# Altium PCB Nebulizer_medical.PcbDoc
Units mil, origin at the board's own origin, x right, y up, seen from the top; angles counter-clockwise.
Board outline 984.71 x 2243.02 mil, 4 copper layers (Top, Power, GND, Bottom), stack 35.4 mil thick; 125 components, 61 nets, 287 pads, 173 vias.
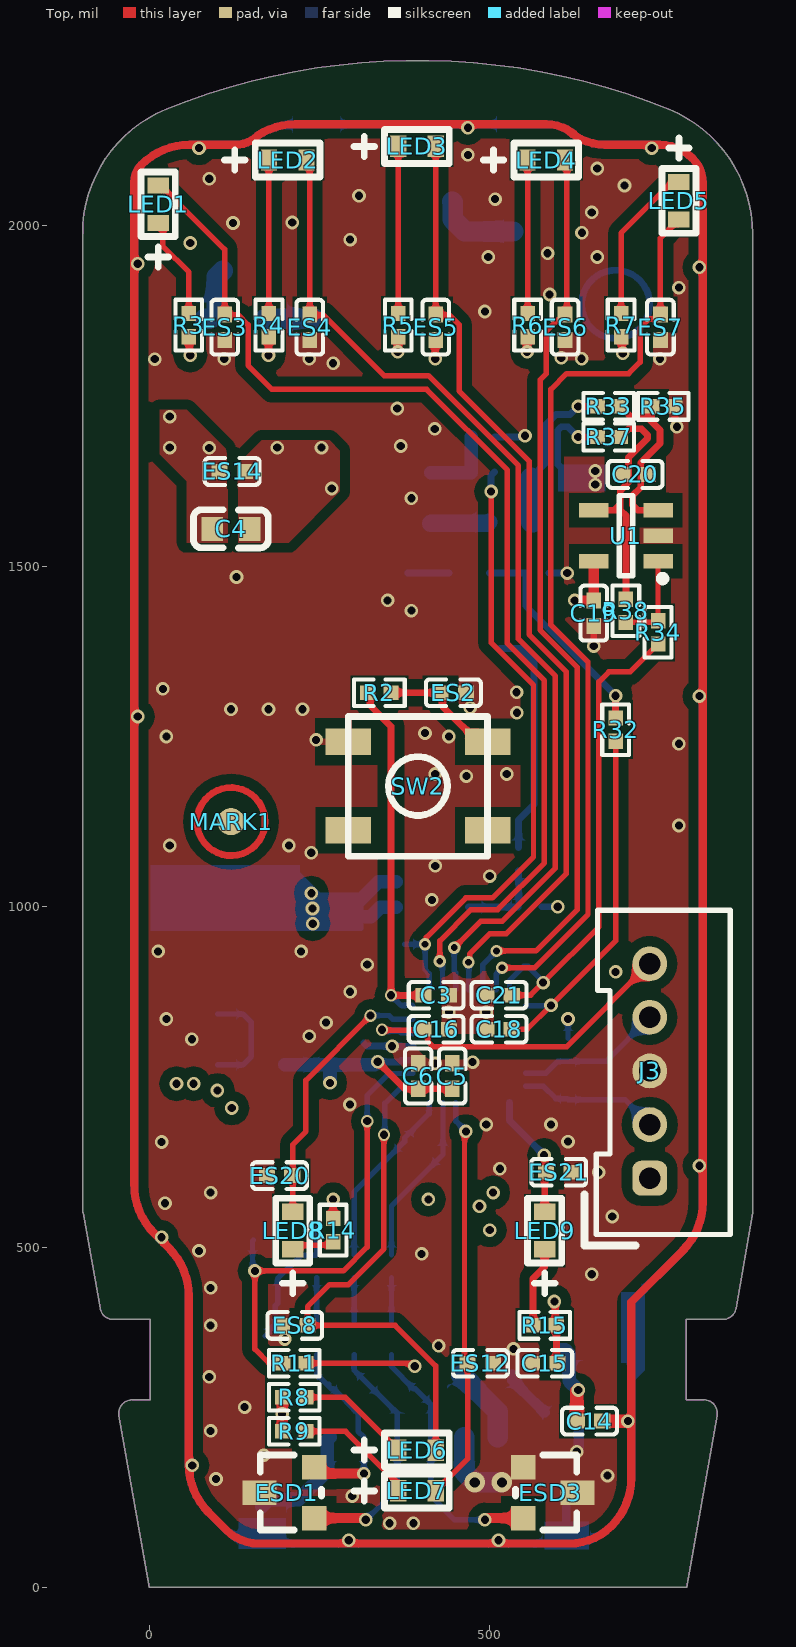
[diagram p0: Top view]
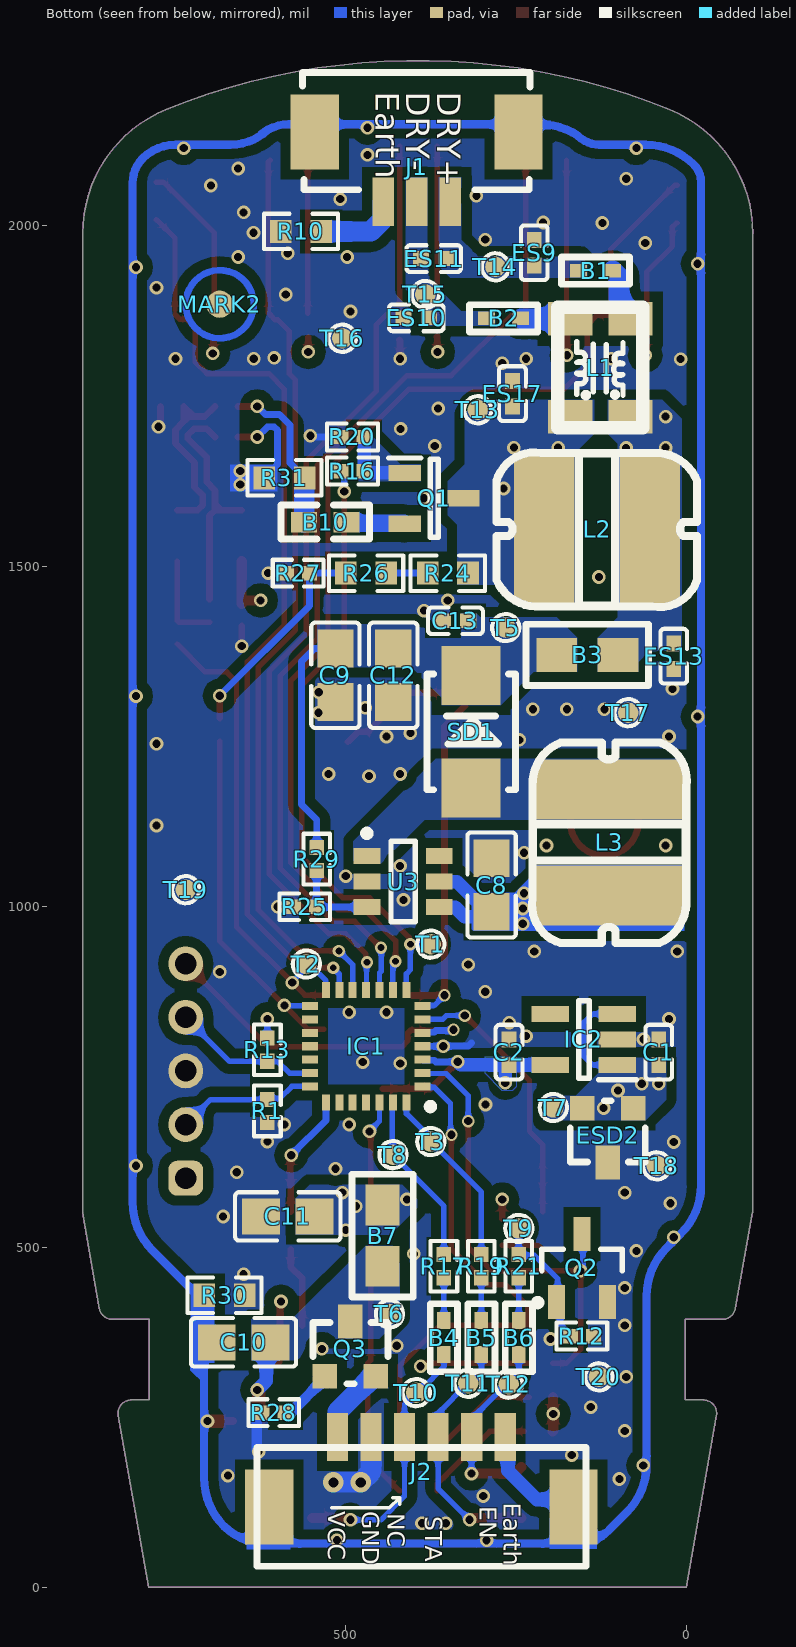
[diagram p1: Bottom view, seen from below]
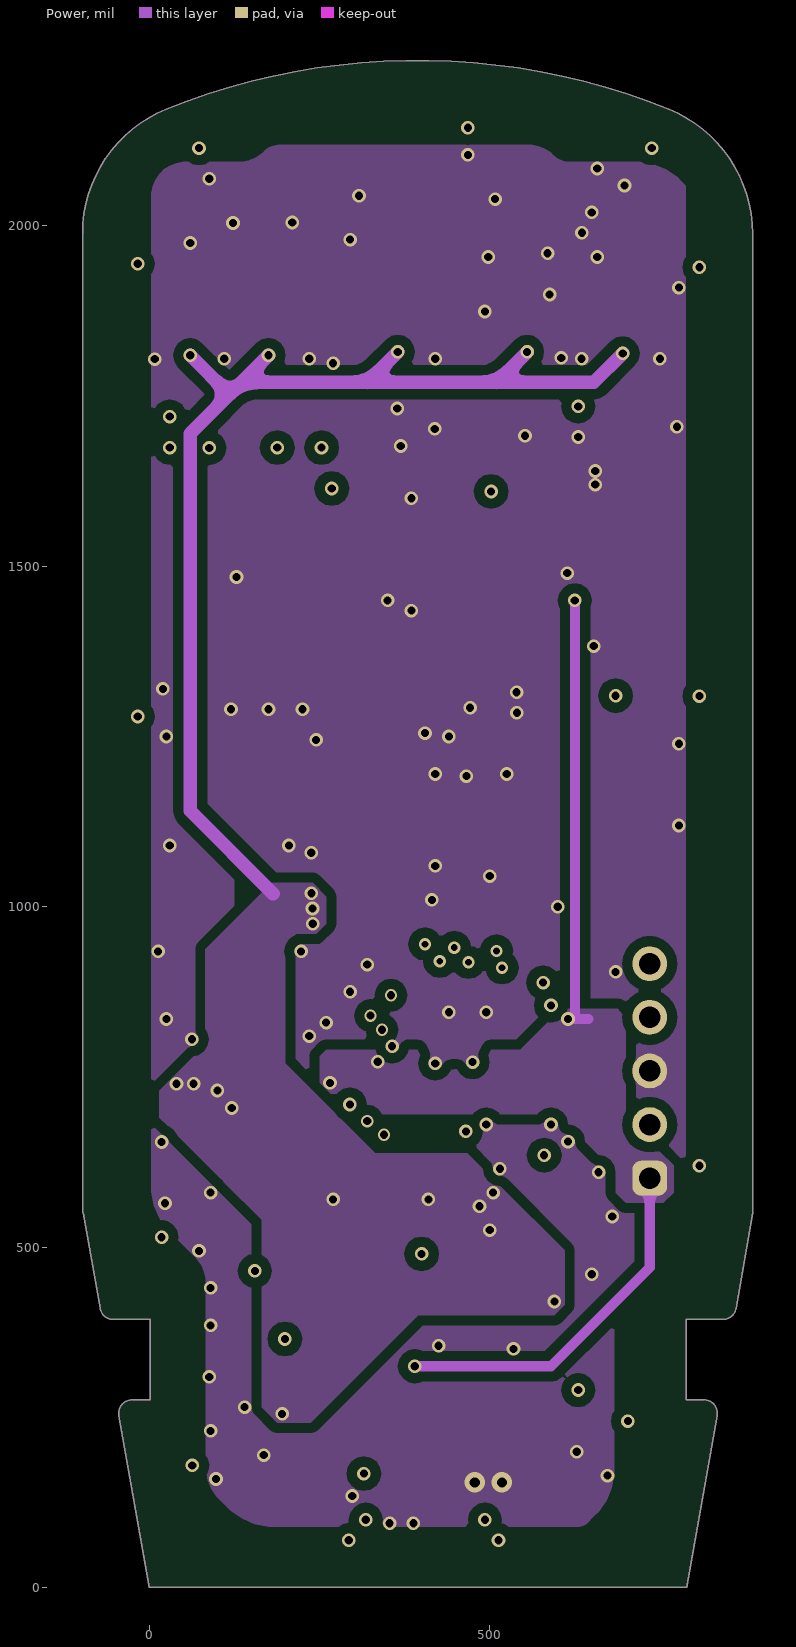
[diagram p2: Power]
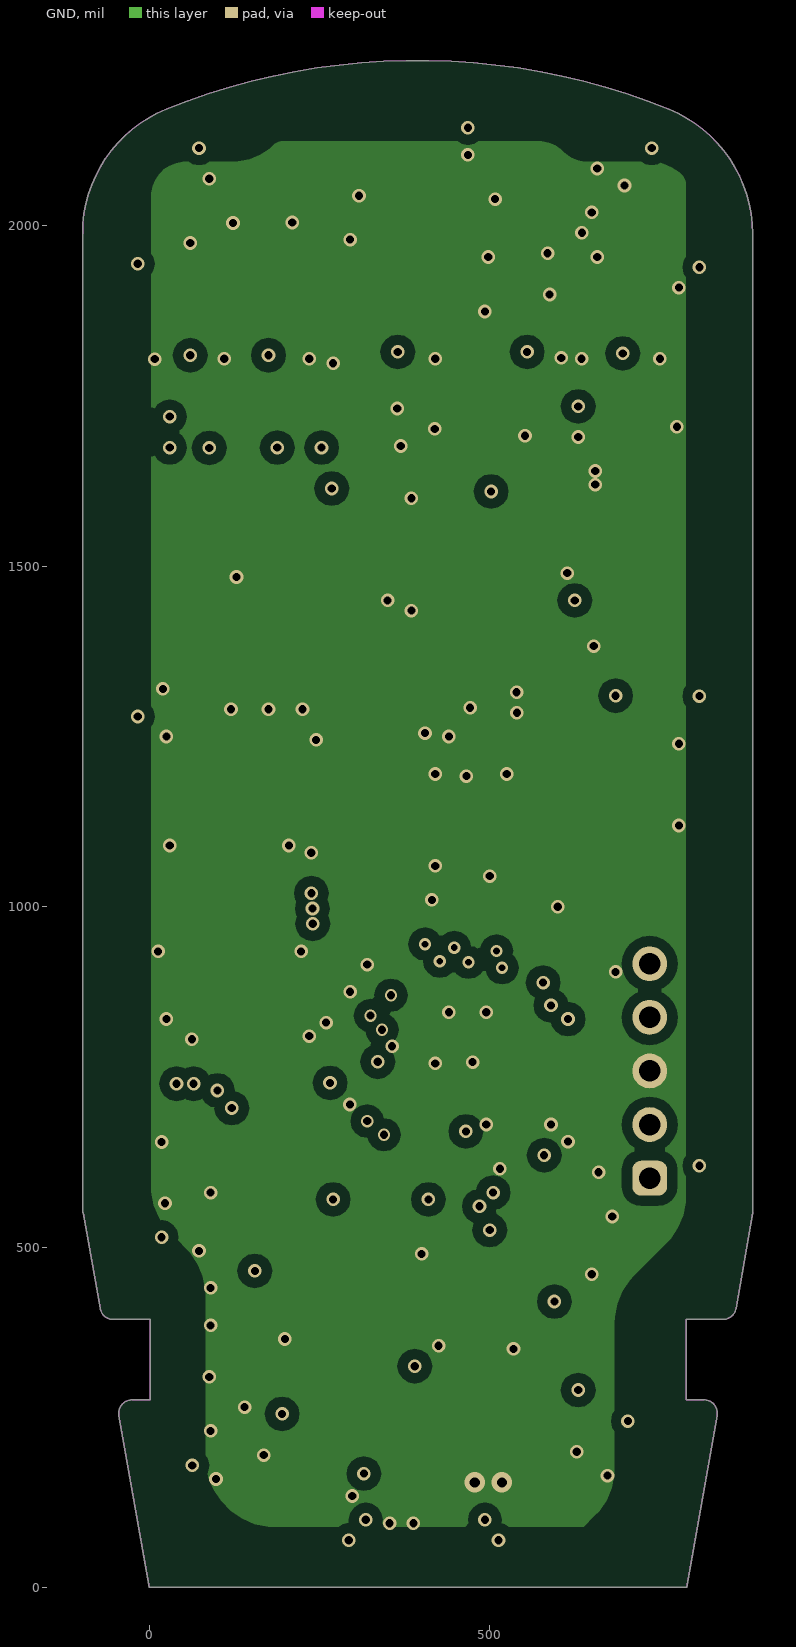
[diagram p3: GND]
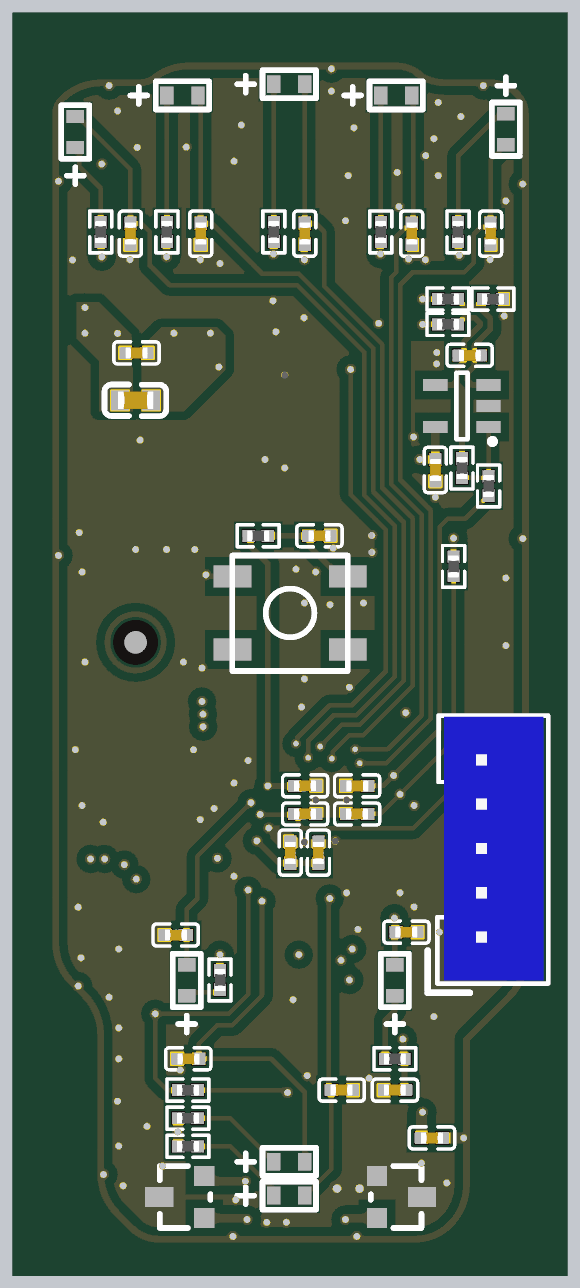
[diagram p4: 3D render of the assembled board from above, using the file's embedded part models]
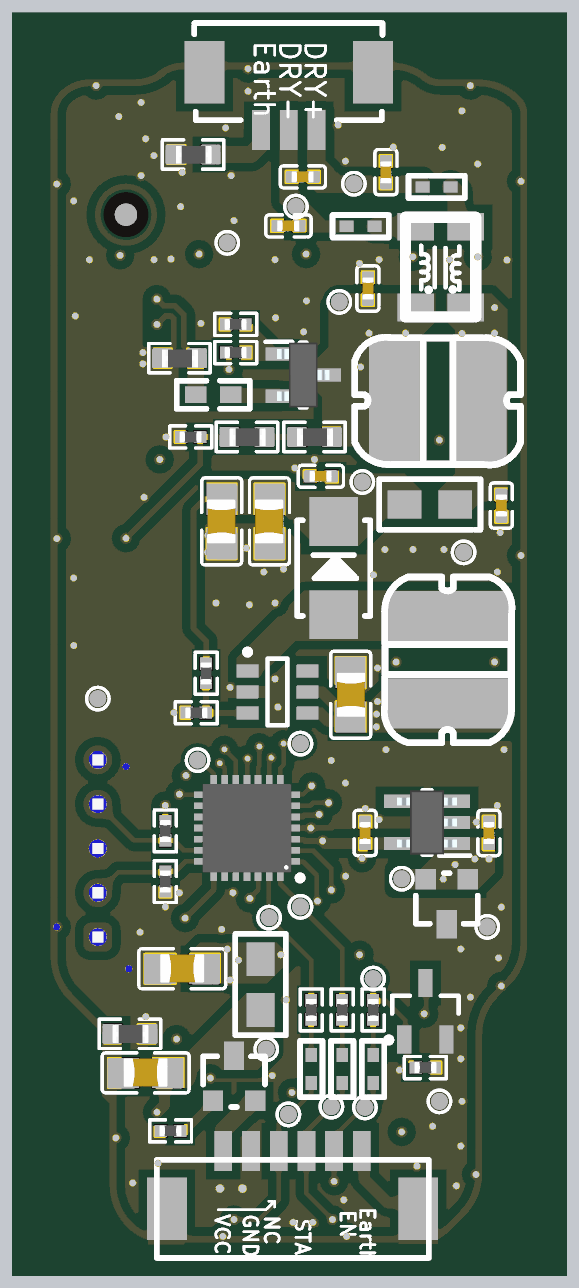
[diagram p5: 3D render of the assembled board from below, using the file's embedded part models]

## Layer stack, top to bottom
Solder Mask Top: solder mask 0.4, Solder Resist, Dk 3.5
Top: signal copper 1.35
Dielectric1: dielectric 10, FR-4, Dk 4.3
Power: signal copper 1.35
Dielectric2: dielectric 10, FR-4, Dk 4.3
GND: signal copper 1.35
Dielectric3: dielectric 10, FR-4, Dk 4.3
Bottom: signal copper 1.35
Solder Mask Bottom: solder mask 0.4, Solder Resist, Dk 3.5

## Board outline
0,0 -44.61,252.49 cw(c-25.23,255.91) -25.23,275.59 1.05,275.59 1.05,393.7 -52.99,393.7 cw(c-52.99,413.39) -72.38,409.97 -97.08,550.06 -98.13,551.11 -98.13,1988.85 cw(c98.72,1988.85) 24.9,2171.34 cw(c393.99,1258.91) 763.09,2171.34 cw(c689.27,1988.85) 886.12,1988.85 886.12,550.69 886.58,550.03 861.88,409.97 cw(c842.49,413.39) 842.49,393.7 788.45,393.7 788.45,275.59 814.73,275.59 cw(c814.73,255.91) 834.11,252.49 789.54,0

## Design rules (kind name [scope] priority, off if disabled: settings)
BoardOutlineClearance [OnLayer('Inner Layer 3')] p1: gap=20 ignorepadtopadclearanceinfootprint=FALSE
Clearance Clearance_polygon [InPolygon] p1: gap=15 ignorepadtopadclearanceinfootprint=FALSE
Clearance Clearance_all [All] p2: gap=8 ignorepadtopadclearanceinfootprint=FALSE
ComponentClearance "'Default' PADS rule_12" [All] p1: gap=0 collisioncheckmode=3 verticalgap=0 showdistances=FALSE
FlightTimeFalling "'Default' PADS rule_10" [All] p1: maximum=10.00
FlightTimeRising "'Default' PADS rule_9" [All] p1: maximum=10.00
Length "'Default' PADS rule_5" [All] p1: maxlimit=50000 minlimit=0
MatchedLengths "'Default' PADS rule_11" [InNetClass('All Nets')] p1: tolerance=200 checknetsindiffpair=TRUE checkdiffpairvsdiffpair=FALSE checkxsignals=FALSE checkothers=FALSE
MaxMinImpedance "'Default' PADS rule_8" [All] p1: minimum=50.00 maximum=150.0
MinimumSolderMaskSliver [All] p1: minsoldermaskwidth=4
ParallelSegment "'Default' PADS rule_7" [All] p1: limit=1000 gap=200
ParallelSegment "'Default' PADS rule_6" [All] p2: limit=1000 gap=200
PlaneClearance "'Default' PADS rule_14" [All] p1: clearance=13
PlaneConnect "Power Plane Connect Style - from global settings" [All] p1: planeconnectstyle=Relief reliefexpansion=20 reliefentries=2 reliefconductorwidth=15 reliefairgap=10
PolygonConnect PolygonConnect_via [IsVia] p1: connectstyle=Direct reliefconductorwidth=10 reliefentries=4 polygonreliefangle="90 Angle" airgapwidth=10
PolygonConnect [All] p2: connectstyle=Direct reliefconductorwidth=10 reliefentries=4 polygonreliefangle="90 Angle" airgapwidth=15
RoutingCorners [All] p1: cornerstyle=45-Degree minsetback=10 maxsetback=100
RoutingLayers "'Default' PADS rule_3" [All] p1: top layer_v5=TRUE mid layer 1_v5=TRUE mid layer 2_v5=TRUE bottom layer_v5=TRUE
RoutingPriority "'Default' PADS rule_2" [All] p1: routingpriority=3
RoutingTopology "'Default' PADS rule" [All] p1: topology=Shortest
RoutingVias "'Default' PADS rule_4" [All] p1: holewidth=12 width=20 viastyle="Through Hole" minholewidth=8 minwidth=15 maxholewidth=99 maxwidth=99
SMDToCorner "'Default' PADS rule_16" [All] p1: distance=0
SMDToPlane "'Default' PADS rule_17" [All] p1: distance=0
SilkToSilkClearance [All] p1: silktosilkclearance=0
SilkToSolderMaskClearance SilkscreenOverComponentPads [IsPad] p1: minsilkscreentomaskgap=0 clearancetoexposedcopper=TRUE
SolderMaskExpansion "Solder Mask Expansion from CAM settings" [All] p1: expansion=5 istentingtop=FALSE
SupplyNets "Schematic Supply Nets_3" [InNet('VCC5V0_SYS')] p1: voltage=0.000
SupplyNets "Schematic Supply Nets" [InNet('VCC3V3_SYS')] p2: voltage=0.000
SupplyNets "Schematic Supply Nets_7" [InNet('VCC15V0_DRV')] p3: voltage=0.000
SupplyNets "Schematic Supply Nets_2" [InNet('GND')] p4: voltage=0.000
SupplyNets "Schematic Supply Nets_1" [InNet('GND_S')] p5: voltage=0.000
Width "'Default' PADS rule_13" [All] p1: maxlimit=100 minlimit=8 preferedwidth=10
20 further rules are at their usual default settings.

## Classes and differential pairs
component class Nebulizer_medical: B4 B5 B6 B7 C3 C5 C6 C10 C11 C14 C15 C16 ES2 ESD1 ESD2 ESD3 IC1 J1 J2 J3 MARK1 MARK2 Q2 Q3 R1 R2 R10 R11 R12 R13 R17 R19 R21 R28 R30 SW2 T1 T2 T3 T6 T7 T8 T9 T10 T11 T12 T14 T15 T16 T19 T20
component class Driver: B1 B2 B3 B10 C4 C12 C18 C19 C20 C21 ES9 ES10 ES11 ES13 ES14 ES17 L1 L2 Q1 R16 R20 R24 R26 R27 R31 R32 R33 R34 R35 R37 R38 T13 U1
component class Indicate: ES3 ES4 ES5 ES6 ES7 ES8 ES12 ES20 ES21 LED1 LED2 LED3 LED4 LED5 LED6 LED7 LED8 LED9 R3 R4 R5 R6 R7 R8 R9 R14 R15
component class Power: C1 C2 C8 C9 C13 IC2 L3 R25 R29 SD1 T5 T17 T18 U3

## Components (designator, comment, footprint, x,y, rotation, side; value= is the part's Value field where it differs from the comment)
B1 "220Ohm@100MHz" 0402-B 107.97,1934.37 r0 bottom
B2 "220Ohm@100MHz" 0402-B 242.97,1864.37 r0 bottom
B3 "1K±25%@100MHz" 0805-B 190,1370 r180 bottom
B4 "220Ohm@100MHz" 0402-B 355.73,341.89 r90 bottom
B5 "220Ohm@100MHz" 0402-B 300.73,341.89 r90 bottom
B6 "220Ohm@100MHz" 0402-B 245.73,341.89 r90 bottom
B7 "1K±25%@100MHz" 0805-B 445.73,471.89 r90 bottom
B10 "1K±25%@100MHz" 0603 530,1565 r180 bottom
C1 "1uF ±10% 25V X5R" C0402 40,805 r270 bottom
C2 "1uF ±10% 25V X5R" C0402 260,805 r270 bottom
C3 "100nF ±10% 50V X7R" C0402 440,870 r180 top
C4 "100pF/100V" C0603 120,1555 r0 top
C5 "4.7uF ±10% 10V X5R" C0402 445,770 r270 top
C6 "100nF ±10% 50V X7R" C0402 395,770 r270 top
C8 "22uF/16V" C0805 285.73,1031.89 r90 bottom
C9 "22uF/25V" C0805 515,1340 r270 bottom
C10 "22uF/16V" C0805 650,360 r0 bottom
C11 "22uF/16V" C0805 585,545 r0 bottom
C12 "22uF/25V" C0805 430,1340 r270 bottom
C13 "100nF ±10% 50V X7R" C0402 320,1420 r0 bottom
C14 "100nF ±10% 50V X7R" C0402 627.97,244.37 r0 top
C15 "100nF ±10% 50V X7R" C0402 599.65,329.37 r180 top
C16 "100nF ±10% 50V X7R" C0402 440,820 r180 top
C18 "2.2nF ±5% 50V X7R" C0402 532.4,820 r180 top
C19 "100nF 50V 0402" C0402 652.76,1412.6 r90 top
C20 "100nF 50V 0402" C0402 695,1635 r0 top
C21 "15nF ±5% 50V X7R" C0402 495,870 r0 top
ES2 "NC" C0402 427.97,1314.37 r0 top
ES3 "NC" C0402 110.73,1832.59 r90 top
ES4 "NC" C0402 235.73,1832.59 r90 top
ES5 "NC" C0402 420.73,1832.59 r90 top
ES6 "NC" C0402 610.73,1832.59 r90 top
ES7 "NC" C0402 750.73,1832.59 r90 top
ES8 "NC" C0402 195,385 r0 top
ES9 "NC" C0402 222.97,1979.37 r270 bottom
ES10 "NC" C0402 377.6,1865 r0 bottom
ES11 "NC" C0402 351.94,1952.09 r0 bottom
ES12 "NC" C0402 505,329.37 r180 top
ES13 "NC" C0402 17.97,1349.37 r90 bottom
ES14 "NC" C0402 102.97,1639.37 r0 top
ES17 "NC" C0402 255,1735 r90 bottom
ES20 "NC" C0402 172.6,605 r0 top
ES21 "NC" C0402 620,610 r180 top
ESD1 "PESD5V2S2UT" SOT23 202.97,139.37 r90 top
ESD2 "PESD5V2S2UT" SOT23 115,665 r0 bottom
ESD3 "PESD5V2S2UT" SOT23 587.97,139.37 r270 top
IC1 "STM32C031G6U6" QFN50P400X400X60-28N-D 470,795 r0 bottom
IC2 "ME6211C33M5G-N" SOT95P270X145-5N 150,805 r0 bottom
J1 "1.25T-3PWT" WAFER_1.25MMX3P_180 395.73,2086.89 r0 bottom locked
J2 "1.25T-6PWT" WAFER_1.25MMX6P_180 388.96,118.53 r180 bottom locked
J3 "JST_PH 2.00-5" "JST_PH 2.00-5" 735,601.26 r90 top
L1 "22uH@100kHz/50V 1812" LINEFILTER 125.73,1791.89 r90 bottom
L2 "470uH/260mA" SP0502 130.73,1554.13 r180 bottom
L3 "10uH/2.5A" SP0502 112.97,1094.37 r90 bottom
LED1 "LED_BLUE" LED0603 12.97,2004.37 r90 top
LED2 "LED_BLUE" LED0603 175.62,2096.89 r0 top
LED3 "LED_BLUE" LED0603 365.62,2116.89 r0 top locked
LED4 "LED_BLUE" LED0603 555.62,2096.89 r0 top locked
LED5 "LED_BLUE" LED0603 777.97,2064.37 r270 top
LED6 "LED_RED" LED0603 365.62,201.89 r0 top locked
LED7 "LED_GREEN" LED0603 365.62,141.89 r0 top locked
LED8 "LED_BLUE" LED0603 210.73,496.77 r90 top locked
LED9 "LED_BLUE" LED0603 580.73,496.77 r90 top locked
MARK1 "MARK_POINT" MARK_POINT 120,1125 r90 top
MARK2 "MARK_POINT" MARK_POINT 685,1885 r90 bottom
Q1 "FDN86246" SOT95P237X122-3N 370,1600 r180 bottom
Q2 "AO3410" SOT23-3 152.97,469.37 r90 bottom
Q3 "AO3401" SOT23 492.97,349.37 r180 bottom
R1 "10KΩ ±1% 62.5mW" R0402 615,700 r90 bottom
R2 "NC" R0402 337.97,1314.37 r180 top
R3 "220/1%" R0402 57.97,1854.37 r90 top
R4 "220/1%" R0402 175.73,1854.37 r90 top
R5 "220/1%" R0402 365.73,1854.37 r90 top
R6 "220/1%" R0402 555.73,1854.37 r90 top
R7 "220/1%" R0402 692.97,1854.37 r90 top
R8 "220/1%" R0402 212.97,279.37 r0 top
R9 "220/1%" R0402 212.97,229.37 r0 top
R10 "0/1%" R0603 565.73,1991.89 r0 bottom
R11 "4.7K/1%" R0402 212.97,329.37 r180 top
R12 "10K" R0402 152.97,369.37 r180 bottom
R13 "10KΩ ±1% 62.5mW" R0402 615,790 r90 bottom
R14 "220/1%" R0402 270,525 r270 top
R15 "220/1%" R0402 580.73,385 r180 top
R16 "30/1%" R0402 490,1640 r180 bottom
R17 "47/1%" R0402 355.73,471.89 r270 bottom
R19 "47/1%" R0402 300.73,471.89 r270 bottom
R20 "220K/1%" R0402 490,1690 r180 bottom
R21 "330R" R0402 245.73,471.89 r270 bottom
R24 "68KΩ ±1% 62.5mW" R0603 350,1490 r0 bottom
R25 "10K/1%" R0402 560,1000 r0 bottom
R26 "68KΩ ±1% 62.5mW" R0603 470,1490 r0 bottom
R27 "10KΩ ±1% 62.5mW" R0402 570,1490 r0 bottom
R28 "10K/1%" R0402 605.73,256.89 r180 bottom
R29 "220K/1%" R0402 542.45,1070 r90 bottom
R30 "0/1%" R0603 677.97,429.37 r0 bottom
R31 "100mΩ ±1% 100mW" R0603 590,1630 r0 bottom
R32 "1kΩ ±1% 62.5mW" R0402 685,1260 r270 top
R33 "10K/0.1%" R0402 675,1735 r0 top
R34 "330R" R0402 747.24,1402.96 r270 top
R35 "47K/0.1%" R0402 755,1735 r180 top
R37 "10K/0.1%" R0402 675,1690 r0 top
R38 "47K/0.1%" R0402 700,1434.68 r270 top
SD1 "SS24" SMA-403D 315.73,1256.89 r270 bottom
SW2 "NC" HTS-52MB 394.55,1177.25 r0 top locked
T1 "PWM" TP-SIP-1-Small1 375,945 r180 bottom
T2 "CT_AD" TP-SIP-1-Small1 557.76,915.79 r180 bottom
T3 "NEB_FB" TP-SIP-1-Small1 375,655 r180 bottom
T5 "15VDC" TP-SIP-1-Small1 265,1410 r180 bottom
T6 "VIN" TP-SIP-1-Small1 435.73,401.89 r180 bottom
T7 "VCC" TP-SIP-1-Small1 195,705 r180 bottom
T8 "PlugInCheck" TP-SIP-1-Small1 430.63,635.79 r180 bottom
T9 "EN_FOG" TP-SIP-1-Small1 245.73,527.45 r180 bottom
T10 "Dev_NC" TP-SIP-1-Small1 396.42,286.2 r90 bottom
T11 "NebSt" TP-SIP-1-Small1 320,300 r90 bottom
T12 "EN_Fog" TP-SIP-1-Small1 260.4,298.66 r90 bottom
T13 "DRY" TP-SIP-1-Small1 305.92,1730 r90 bottom
T14 "P+" TP-SIP-1-Small1 280,1940 r90 bottom
T15 "P-" TP-SIP-1-Small1 382.97,1899.37 r90 bottom
T16 "GND" TP-SIP-1-Small1 505,1835 r90 bottom
T17 "GND" TP-SIP-1-Small1 85,1285 r90 bottom
T18 "GND" TP-SIP-1-Small1 42.97,619.37 r90 bottom
T19 "GND" TP-SIP-1-Small1 735,1025 r90 bottom
T20 "GND" TP-SIP-1-Small1 127.97,309.37 r90 bottom
U1 "TLV333IDBVR" SOT23-5 700,1545 r180 top
U3 "MT3608" SOT95P280X110-6N 415.73,1036.89 r180 bottom

## Footprints (in the part's own frame and the unit in brackets; to place one, negate y for a bottom-side part, rotate by r counter-clockwise, add the part's x,y. Pads: shape width x height; smd on the part's side, far side on the other; paste and mask are expansions set on the pad)
0402-B [mil] "BEAD-0402"
  rect 25x20 smd mask+5: 1(0,0) 2(50,0)
  silkscreen extent -25,-20 75,20
0603 [mil]
  rect 38x30 smd mask+5: 1(-31,0) 2(31,0)
  silkscreen extent -65,-25 65,25
0805-B [mil] "BEAD"
  rect 60x50 smd mask+5: 1(0,0) 2(90,0)
  silkscreen extent -45,-45 135,45
C0402 [mm]
  rect 0.6x0.55 smd paste-100 mask+0.051: 1(0,0) 2(0.95,0)
  silkscreen extent -0.55,-0.5 1.5,0.5, body extent -0.02,-0.25 0.98,0.25, height 0.5
C0603 [mm]
  rect 0.8x0.9 smd mask+0.051: 1(-0.7,0) 2(0.7,0)
  silkscreen extent -1.41,-0.71 1.39,0.72, body extent -0.8,-0.4 0.8,0.4, height 0.8
C0805 [mm]
  rect 1.41x1.35 smd mask+0.051: 1(-1,0) 2(1,0)
  silkscreen extent -1.96,-0.9 1.96,0.9, body extent -1,-0.66 1,0.64, height 1.3
HTS-52MB [mm]
  rect 1.7x1 smd mask+0.127: 1(-2.6,1.65) 2(2.6,1.65) 3(-2.6,-1.65) 4(2.6,-1.65)
  silkscreen extent -2.6,-2.62 2.6,2.59
"JST_PH 2.00-5" [mm]
  rrect50% 1.3x1.3 hole 0.8 mask+0.127: 1(0,0)
  round 1.3 hole 0.8 mask+0.127: 2(2,0) 3(4,0) 4(6,0) 5(8,0)
  silkscreen extent -2.51,-3 10,2.44, body extent -1.95,-2.8 9.95,1.7, height 6
LED0603 [mm] "LED"
  rect 0.6x0.8 smd mask+0.127: 1(0,0) 2(1.4,0)
  silkscreen extent -1.65,-0.64 1.91,0.64
LINEFILTER [mm]
  rect 1.25x1.65 smd mask+0.127: 1(-1.825,-1.125) 2(1.825,-1.125) 3(1.825,1.125) 4(-1.825,1.125)
  silkscreen extent -2.25,-1.58 2.25,1.59
MARK_POINT [mil] "MARK"
  round 40 smd mask+5: 0(0,0)
  Top circle w10: c0,0 r50
QFN50P400X400X60-28N-D [mm]
  rect 0.6x0.3 smd mask+0.127: 1(-2.1,1.5) 2(-2.1,1) 3(-2.1,0.5) 4(-2.1,0) 5(-2.1,-0.5) 6(-2.1,-1) 7(-2.1,-1.5) 15(2.1,-1.5) 16(2.1,-1) 17(2.1,-0.5) 18(2.1,0) 19(2.1,0.5) 20(2.1,1) 21(2.1,1.5)
  rect 0.3x0.6 smd mask+0.127: 8(-1.5,-2.1) 9(-1,-2.1) 10(-0.5,-2.1) 11(0,-2.1) 12(0.5,-2.1) 13(1,-2.1) 14(1.5,-2.1) 22(1.5,2.1) 23(1,2.1) 24(0.5,2.1) 25(0,2.1) 26(-0.5,2.1) 27(-1,2.1) 28(-1.5,2.1)
  silkscreen extent -2.52,2.13 -2.27,2.37, body extent -2,-2 2,2, height 0.6
R0402 [mm]
  rect 0.566x0.54 smd mask+0.051: 1(-0.433,0) 2(0.433,0)
  silkscreen extent -0.94,-0.5 0.94,0.5, body extent -0.5,-0.25 0.5,0.25, height 0.5
R0603 [mil]
  rect 31.75x34.02 smd mask+2: 1(-29.66,0) 2(29.66,0)
  silkscreen extent -55,-26 55,26, body extent -33,-16 31,16, height 18
SMA-403D [mm]
  rect 2.2x2.2 smd mask+0.127: 1(2.1,0) 2(-2.1,0)
  silkscreen extent -2.16,-1.65 2.16,1.65
SOT23 [mil]
  rect 36x36 smd mask+5: 1(-37.5,-39) 2(37.5,-39)
  rect 36x50 smd mask+5: 3(0,41)
  silkscreen extent -55,-50 55,40
SOT23-3 [mil] "SOT23, 3-Leads, Body 2.92x2.78mm, Pitch 0.95mm, IPC Medium Density"
  rect 50x25 smd mask+5: 1(-50,37.5) 2(-50,-37.5) 3(50,0)
  silkscreen extent -56,-59 28,70
SOT23-5 [mm] "SOT23, 5-Leads, Body 2.90x2.80mm, Pitch 0.95mm, IPC Medium Density"
  rect 1.1x0.55 smd mask+0.127: 1(-1.2,0.95) 2(-1.2,0) 3(-1.2,-0.95) 4(1.2,-0.95) 5(1.2,0.95)
  silkscreen extent -1.5,-1.5 0.25,1.73, body extent -0.9,-1.5 0.9,1.5, height 1
SOT95P237X122-3N [mm]
  rect 1.2x0.6 smd mask+0.127: 1(-1.1,0.95) 2(-1.1,-0.95) 3(1.1,0)
  silkscreen extent -1.7,-1.46 0.15,1.5, body extent -1.18,-1.46 1.18,1.46, height 1.22
SOT95P270X145-5N [mm]
  rect 1.4x0.6 smd mask+0.127: 1(-1.25,0.95) 2(-1.25,0) 3(-1.25,-0.95) 4(1.25,-0.95) 5(1.25,0.95)
  silkscreen extent -1.95,-1.45 0.2,1.5, body extent -1.35,-1.45 1.35,1.45, height 1.45
SOT95P280X110-6N [mm] "SOT23, 6-Leads, Body 2.90x2.80mm, Pitch 0.95mm, IPC Medium Density"
  rect 1x0.6 smd mask+0.127: 1(-1.35,0.95) 2(-1.35,0) 3(-1.35,-0.95) 4(1.35,-0.95) 5(1.35,0) 6(1.35,0.95)
  silkscreen extent -1.48,-1.5 0.45,1.92, body extent -0.85,-1.5 0.85,1.5, height 1.1
SP0502 [mm]
  rect 2.25x5.5 smd mask+0.127: 1(-1.975,0) 2(1.975,0)
  silkscreen extent -3.75,-2.9 3.73,2.87
TP-SIP-1-Small1 [mil] "test point"
  round 30 smd mask+5: 1(0,0)
  silkscreen extent -20,-20 20,20
WAFER_1.25MMX3P_180 [mm] "1.25T-3PWT"
  rect 0.8x1.8 smd mask+0.127: 1(-1.25,1.3) 2(0,1.3) 3(1.25,1.3)
  rect 1.8x2.8 smd mask+0.127: 4(3.8,-1.3) 5(-3.8,-1.3)
  silkscreen extent -4.23,-3.52 4.26,0.86
WAFER_1.25MMX6P_180 [mm]
  rect 0.8x1.8 smd mask+0.127: 1(-3.125,2.6) 2(-1.875,2.6) 3(-0.625,2.6) 4(0.625,2.6) 5(1.875,2.6) 6(3.125,2.6)
  rect 1.8x2.8 smd mask+0.127: 7(-5.675,0) 8(5.675,0)
  silkscreen extent -6.13,-2.22 6.15,2.21

## Part data
B1 B2 B3 B4 B5 B6 B7 L2 L3: library part Inductor, "Inductor"
B10 R2 R3 R4 R5 R6 R7 R8 R9 R10 R14 R15 R16 R20 R25 R28 R29 R30: library part Res3, "Resistor"
C1 C2 C5: library part Cap, "CL05A475KP5NRNC"
C3 C4 C13 C14 C15 ES2 ES3 ES4 ES5 ES6 ES7 ES8 ES9 ES10 ES11 ES12 ES13 ES14 ES17 ES20 ES21: library part "Cap Semi", "Capacitor (Semiconductor SIM Model)"
C6 C16: library part Cap, "Capacitor"
C8 C9 C10 C11 C12: library part Cap2, "Capacitor"
C18: library part Cap, "CL05B222JB5NNNC"
C19: library part C-0603
C20 C21: library part 100nF_1, "贴片瓷介电容100nF±5%,0805"
ESD1 ESD2 ESD3: library part ESD, "ESD"
IC1 IC2: "Integrated Circuit"
J1: library part "Header 5", "Header, 5-Pin"
J2: library part "Header 8", "Header, 8-Pin"
J3: "品牌：JST 型号：B5B-PH-K-S，直插，间距2.00，5pin"
L1: library part Inductor_common, "Inductor_common"
LED1 LED2 LED3 LED4 LED5 LED6 LED7 LED8 LED9: library part LED2, "Typical RED, GREEN, YELLOW, AMBER GaAs LED"
Q1: "MOSFET (N-Channel)"
Q2: "AOS,AO3410,SOT23-3,-55~+150°C,"
Q3: library part MOSFET-P, "P-Channel MOSFET"
R1 R11 R12 R13 R17 R19 R21 R24 R26 R27: library part R-0603
R31: library part R-0603, "0603WAF100LT5E"
R32: library part Res_0402, "Resistor"
R33 R34 R35: library part "R 0603", "贴片电阻,0603"
R37 R38: library part 1K_1, "国巨RC0805FR-071K"
SD1: library part "D Schottky", "Schottky Diode"
SW2: library part SW-PB, "Switch"
T1 T2 T3 T5 T6 T7 T8 T9 T10 T11 T12 T13 T14 T15 T16 T17 T18 T19 T20: library part TP-SIP-1-Small
U1: "品牌：TI，型号：TLV333IDBVR,SOIC-8,–25°~+85°C,单运放，ROHS"
U3: "DC-DC-BOOST"

## Via types
v1: diameter 20, hole 12, Top to Bottom, tented both sides, 160 vias
v2: diameter 18, hole 10, Top to Bottom, tented both sides, 6 vias
v3: diameter 18, hole 12, Top to Bottom, tented both sides, 5 vias
v4: diameter 30, hole 15, Top to Bottom, tented both sides, 2 vias

## Nets (pads, with @x,y where several pads share a name; then routed paths per layer and width w, separated by ;. In a path a pad name is that pad's centre, name@x,y a point inside that pad or via, vN(x,y) a via of type N, cw(c..) or ccw(c..) an arc to the next point about the centre after c; other vN are vias at no path point)
DEV_NC: B4.1 ESD3.2 J2.3 T10.1 | length 380.6
  Top w15: v1@495.47,101.87 ESD3.2
  Bottom w8: B4.1 355.73,324.27 388.11,291.89 390.73,291.89 413.56,269.06 J2.3 413.56,134.06 448.25,99.37 v1(492.97,99.37)
EN_FOG: B6.1 ESD1.2 J2.5 T12.1 | length 284.4
  Top w15: ESD1.2 251.64,167.21 v1(315.14,167.21)
  Bottom w8: B6.1 245.73,313.33 T12.1 263.66,298.66 263.66,295.4 266.93,292.13 270.18,292.13 306.89,255.43 306.89,229.14 J2.5 v1(315.14,167.21)
Fog_EN_SET: IC1.2 Q2.3 R11.2 | length 694.9
  Top w8: R11.2 175.63,329.37 155,350 v1(155,465) 285,465 320,500 v3(320,685)
  Bottom w8: Q2.3@152.97,510.37 151.59,508.99 151.59,471.12 155,467.71 v1(155,465) ; v3(320,685) 320,722.57 352.43,755 386.69,755 IC1.2
GND: C1.1 C2.1 C3.1 C5.1 C6.1 C8.2 C9.2 C11.2 C12.2 C13.2 C15.2 C16.1 C18.2 C19.1 C21.1 ES2.2 ES3.1 ES4.1 ES5.1 ES6.1 ES7.1 ES8.1 ES9.1 ES10.2 ES12.1 ES13.1 ES17.2 ES20.1 ES21.1 ESD1.3 ESD2.3 ESD3.1 ESD3.3 IC1.4 IC2.2 J2.2 J3.3 Q2.2 R1.1 R10.2 R12.2 R20.1 R25.2 R27.2 R28.1 R30.1 R31.2 R35.1 R37.1 SW2.1 T16.1 T17.1 T18.1 T19.1 T20.1 U1.2 U3.2 | length 575.7
  Top w10: v1(420,1805) 420,1831.86 ES5.1 ; v1(630,1690) R37.1 ; v1(652.76,1382.76) C19.1 ; R35.1 772.04,1707.96 v1(775,1705)
  Bottom w10: 315,800 319.7,795.3 356.35,795.3 v1(356.65,795) IC1.4 ; R20.1 550,1690 v1(551.87,1691.87) ; R25.2 v1(600,1000) ; R27.2 v1(614,1490) v1@615,1490 ; R31.2 600,1649.66 600,1700 605,1705 615,1705 v1(630,1690)
  Bottom w15: v1(627.97,199.37) 630.73,202.13 R28.1@630.73,256.89
  Bottom w30: J2.2 462.78,169.57 v4(477.97,154.37) v4(517.97,154.37)
  other v1: 352.97,94.37 387.97,94.37 297.97,134.37 97.97,159.37 672.97,164.37 167.97,194.37 90,230 140,265 87.97,309.37 535,350.5 425,355 199.15,365 90,385 90,440 650,460 400,490 72.97,494.37 680,545 22.97,564.37 90,580 660,610 515,615 17.97,654.37 615,655 495,680 590,680 294.6,709.4 419.91,769.86 474.84,771.69 62.48,805.41 235,810 259.66,829.71 25,835 440,845 495,845 295,875 684.89,904.26 320,915 12.97,934.37 222.97,934.37 415,1010 500,1045 420,1060 237.97,1079.37 30,1090 205,1090 777.97,1119.37 465.73,1191.89 420,1195 525,1195 777.97,1239.37 245,1245 25,1250 440,1250 405,1255 540,1285 120,1290 175,1290 225,1290 471.15,1292.37 539.61,1315 20,1320 385,1435 350,1450 127.97,1484.37 385,1600 655,1620 655,1640 369.26,1676.84 419.26,1701.84 364.26,1731.84 270,1798.3 7.97,1804.37 110,1805 235,1805 635,1805 750,1805 605.1,1806.18 492.97,1874.37 587.97,1899.37 777.97,1909.37 497.97,1954.37 657.97,1954.37 585,1960 60,1975 295,1980 635.43,1990 122.97,2004.37 210,2005 650,2020 507.97,2039.37 307.97,2044.37 697.97,2059.37 87.97,2069.37 657.97,2084.37 467.97,2104.37
GND_S: C10.2 C14.2 J1.4 J1.5 J2.6 J2.7 J2.8 R30.2 | length 11325.8
  Top w12: C14.2 v1@692.97,244.37 ; 614.19,2141.36 cw(c583.08,2084.94) 628.64,2130.5 ; 614.19,2141.36 ccw(c669.48,2199.87) 628.64,2130.5 ; 614.19,2141.36 ccw(c583.08,2084.94) 583.08,2149.37 214.4,2149.37 ccw(c214.4,2049.37) 159.09,2132.69 cw(c126.94,2164.83) 149.18,2125.18 cw(c126.94,2164.83) 126.94,2119.37 59.4,2119.37 ccw(c59.4,2019.37) -11.32,2090.08 -12.03,2089.37 ccw(c12.12,2065.23) -22.03,2065.23 -22.03,590.79 ccw(c77.97,590.79) 7.26,520.08 28.68,498.66 cw(c-42.03,427.95) 57.97,427.95 57.97,180.79 ccw(c157.97,180.79) 87.26,110.08 112.97,84.37 ccw(c161.26,132.65) 161.26,64.37 616.61,64.37 ccw(c616.61,152.15) 678.68,90.08 ccw(c607.97,160.79) 707.97,160.79 707.97,419.37 783.68,495.08 ccw(c712.97,565.79) 812.97,565.79 812.97,2063.16 ccw(c761.76,2063.16) 797.97,2099.37 ccw(c749.69,2051.09) 797.93,2099.42 ccw(c749.69,2051.09) 749.69,2119.37 669.48,2119.37 cw(c669.48,2199.87) 633.88,2127.67 cw(c669.48,2199.87) 628.64,2130.5
  Bottom w12: J2.7@612.38,78.29 J2.7 ; C10.2@702.97,360 R30.2@702.97,424.37 ; C10.2@707.97,355 707.97,160.79 cw(c607.97,160.79) 678.68,90.08 cw(c616.61,152.15) 616.61,64.37 161.26,64.37 cw(c161.26,132.65) 112.97,84.37 87.26,110.08 cw(c157.97,180.79) 57.97,180.79 57.97,427.95 ccw(c-42.03,427.95) 28.68,498.66 7.26,520.08 cw(c77.97,590.79) -22.03,590.79 -22.03,2065.23 cw(c12.12,2065.23) -12.03,2089.37 -11.32,2090.08 cw(c59.4,2019.37) 59.4,2119.37 126.94,2119.37 ccw(c126.94,2164.83) 149.18,2125.18 ccw(c126.94,2164.83) 159.09,2132.69 cw(c214.4,2049.37) 214.4,2149.37 583.08,2149.37 cw(c583.08,2084.94) 614.19,2141.36 ; R30.2@707.97,419.37 783.68,495.08 ccw(c712.97,565.79) 812.97,565.79 812.97,2063.16 ccw(c761.76,2063.16) 797.97,2099.37 ccw(c749.69,2051.09) 797.93,2099.42 ccw(c749.69,2051.09) 749.69,2119.37 669.48,2119.37 cw(c669.48,2199.87) 633.88,2127.67 cw(c669.48,2199.87) 628.64,2130.5 ; 614.19,2141.36 ccw(c669.48,2199.87) 628.64,2130.5 ; 614.19,2141.36 cw(c583.08,2084.94) 628.64,2130.5
  Bottom w20: J2.8 176.25,129.25 219.25,129.25 261.6,171.6 261.6,216.57 J2.6
  other v1: 292.97,69.37 512.97,69.37 62.97,179.37 702.97,244.37 17.97,514.37 807.97,619.37 -17.03,1279.37 807.97,1309.37 807.97,1939.37 -17.03,1944.37 72.97,2114.37 737.97,2114.37 467.97,2144.37
H_LED: ES21.2 IC1.22 LED9.2 | length 183.4
  Top w10: v1(580,635) 581.3,633.7 581.3,611.3 ES21.2 580.73,608.14 LED9.2
  Bottom w10: IC1.22 529.06,685.94 v1(580,635)
L_LED: ES20.2 IC1.6 LED8.2 | length 400.3
  Top w8: LED8.2 210.73,650.73 230,670 230,745 v3(325,840)
  Bottom w8: v3(325,840) 325.22,840.22 352.15,840.22 357.37,835 386.69,835 IC1.6
LED_Alarm: ES8.2 IC1.1 LED6.2 | length 777.3
  Top w8: v3(344.64,665.12) 344.64,497.24 292.4,445 265,445 232.4,412.4 ES8.2 361.11,385 420.73,325.38 LED6.2
  Bottom w8: v3(344.64,665.12) 346,666.48 346,711 369.79,734.79 386.17,734.79 IC1.1
LED_Ato_1: ES3.2 IC1.9 LED1.2 | length 1651.7
  Top w8: LED1.2 16.91,2059.49 24.72,2051.68 110.73,1965.67 ES3.2 111.83,1868.89 130.7,1868.89 145,1854.6 145,1795 180,1760 407.37,1760 526,1641.37 526,1386.63 580.37,1332.26 580.37,1064.29 511.66,995.57 472.29,995.57 426.68,949.96 v2(426.68,920)
  Bottom w8: v2(426.68,920) 426.68,917.29 430.63,913.35 IC1.9
LED_Ato_2: ES4.2 IC1.10 LED2.2 | length 1499.6
  Top w8: LED2.2 235.73,2091.89 ES4.2 ; ES4.2@235.73,1869.01 255.99,1869.01 345,1780 410,1780 542,1648 542,1393.25 596.37,1338.88 596.37,1056.62 518.38,978.63 486.81,978.63 v2@448.54,940.36
  Bottom w8: v2@447.73,939.55 447.73,905.48 450.32,902.9 IC1.10
  other v2: 448.05,939.87
LED_Ato_3: ES5.2 IC1.11 LED3.2 | length 1404
  Top w8: LED3.2 ES5.2 421.43,1869.3 440.7,1869.3 455,1855 455,1757.63 558,1654.63 558,1399.88 612.37,1345.51 612.37,1048.11 524.26,960 500,960 470.46,930.46 470.46,919.98 v2(468.84,918.37)
  Bottom w8: v2(468.84,918.37) 469.42,917.79 469.42,878.26 IC1.11
LED_Ato_4: ES6.2 IC1.12 LED4.2 | length 1353
  Top w8: v2(510,935) 567.86,935 628.37,995.51 628.37,1352.14 574,1406.51 574,1774 583.1,1783.1 583.1,1845.59 599.69,1862.18 603.91,1862.18 610.73,1869.01 ES6.2 613.43,1872.68 613.43,2094.2 LED4.2
  Bottom w8: IC1.12 489.84,877.83 489.84,914.84 v2(510,935)
LED_Ato_5: ES7.2 IC1.13 LED5.2 | length 1368
  Top w8: v2(518.21,910.33) 565.82,910.33 644.37,988.88 644.37,1359.78 590,1414.16 590,1760 613,1783 704.06,1783 721.06,1800 721.06,1850.06 734.06,1863.06 743.91,1863.06 750.73,1869.89 ES7.2 ; ES7.2@750.73,1876.89 750.73,1982.01 LED5.2
  Bottom w8: IC1.13 509.37,901.03 518.21,909.87 v2(518.21,910.33)
LED_Normal: ES12.2 IC1.26 LED7.2 | length 598.7
  Top w8: LED7.2 467.6,188.75 ES12.2 463,333.97 463,668 v1(465,670)
  Bottom w8: IC1.26 450.32,685.01 465,670.33 v1(465,670)
NEB_FB: IC1.28 R19.1 T3.1 | length 269
  Bottom w8: R19.1 300.73,580.73 T3.1 375,660 410.94,695.94 IC1.28
NEBST: B5.1 ESD1.1 J2.4 T11.1 | length 361.6
  Top w15: ESD1.1 v1@315.47,101.87
  Bottom w8: B5.1 300.73,319.27 T11.1 364.35,255.65 J2.4 364.35,145.75 v1(317.97,99.37)
NetB1_1: B1.1 L1.2 | length 86.2
  Bottom w30: L1.2 89.2,1863.74 98.8,1873.35 98.8,1925.2 B1.1
NetB2_1: B2.1 L1.3 | length 72.3
  Bottom w30: L1.3 B2.1@242.34,1863.74
NetB3_2: B3.2 C4.1 ES13.2 ES14.1 L1.1 L2.2
  other v1: 30,1674.37 88,1674 30,1720
NetB4_2: B4.2 R17.2 | length 63
  Bottom w8: B4.2 R17.2
NetB5_2: B5.2 R19.2 | length 63
  Bottom w8: B5.2 R19.2
NetB6_2: B6.2 R21.2 | length 63
  Bottom w8: B6.2 R21.2
NetB7_1: B7.1 C10.1 C14.1 Q3.3 T6.1 | length 121.5
  Top w20: C14.1 627.97,287.97 v1(630,290)
  Bottom w20: C10.1@602.97,349.37 610.63,349.37 616.58,343.42 616.58,303.42 v1(630,290)
NetB10_1: B10.1 R31.1 R33.1 | length 241.5
  Top w10: v1(630,1735) R33.1
  Bottom w10: R31.1 582,1651.66 582,1707.46 597.54,1723 618,1723 v1(630,1735)
  Bottom w30: R31.1 561,1630 B10.1 B10.1@563,1565
NetB10_2: B10.2 Q1.2 | length 86.7
  Bottom w25: Q1.2 414,1563.29 497.29,1563.29 B10.2
NetC4_2: C4.2 ES14.2 ES17.1 L1.4 L2.1 Q1.3 R24.1 T13.1
  other v1: 267.97,1614.37 187.97,1674.37 252.97,1674.37
NetC20_1: C20.1 R37.2 R38.1 U1.4 | length 362.7
  Top w10: U1.4 682.4,1582.4 ; R37.2 704.04,1702 723,1702 732,1693 732,1687.8 703.96,1659.76 703.96,1623.63 691.84,1611.51 691.84,1591.84 ; R38.1 700,1574.54 692.14,1582.4 ; 682.4,1582.4 692.14,1582.4 ; 682.4,1582.4 691.84,1591.84 ; 691.84,1591.84 691.84,1582.7 692.14,1582.4
NetC20_2: C20.2 R33.2 R35.2 U1.3 | length 287.1
  Top w10: R33.2 707.04,1720 722.96,1720 ; U1.3 717.6,1582.4 709.84,1590.16 709.84,1604.06 721.96,1616.17 721.96,1652.3 750,1680.35 750,1700.46 737.96,1712.5 ; 722.96,1720 730.46,1720 735.46,1715 ; 722.96,1720 R35.2 737.96,1717.5 ; 735.46,1715 737.96,1712.5 ; 735.46,1715 737.96,1717.5 ; 737.96,1712.5 737.96,1717.5
NetES2_1: ES2.1 R2.1 SW2.2 | length 181.9
  Top w10: R2.1 ES2.1 430.6,1311.75 430.6,1294.4 468.11,1256.89 482.23,1256.89 SW2.2
NetJ1_3: J1.3 R10.1 | length 122.9
  Bottom w30: J1.3 445.69,2034.96 445.69,2009.46 463.27,1991.89 R10.1@534.73,1991.89
NetJ2_1: J2.1 Q3.2 | length 113.2
  Bottom w30: Q3.2@458.31,311.89 511.99,258.22 J2.1
NetL3_2: L3.2 SD1.1 U3.1
NetLED1_1: LED1.1 R3.2 | length 152.3
  Top w8: LED1.1 14.19,2004.37 20,1998.56 20,1970 57.97,1932.03 R3.2
NetLED2_1: LED2.1 R4.2 | length 225.5
  Top w8: R4.2@175.62,1871.41 LED2.1
NetLED3_1: LED3.1 R5.2 | length 245.3
  Top w8: R5.2@365.49,1871.65 365.62,1871.77 LED3.1
NetLED4_1: LED4.1 R6.2 | length 225.4
  Top w8: R6.2@555.62,1871.53 LED4.1
NetLED5_1: LED5.1 R7.2 | length 226.1
  Top w8: R7.2@692.97,1879.37 692.97,1989.37 767.97,2064.37 LED5.1
NetLED6_1: LED6.1 R8.2 | length 167.7
  Top w8: R8.2 288.14,279.37 LED6.1
NetLED7_1: LED7.1 R9.2 | length 169.8
  Top w8: R9.2@237.97,229.37 288.33,229.37 365.62,152.08 LED7.1
NetLED8_1: LED8.1 R14.2 | length 61.8
  Top w8: LED8.1 216.92,502.96 R14.2@270,502.96
NetLED9_1: LED9.1 R15.2 | length 118.8
  Top w10: R15.2 563.69,453.69 580.73,470.73 LED9.1
NetQ1_1: Q1.1 R16.2 R20.2 | length 112.3
  Bottom w20: Q1.1 472.96,1637.4 R16.2 R20.2
NetQ2_1: Q2.1 R12.1 R21.1 T9.1 | length 202.5
  Bottom w8: R12.1 170.52,369.37 176.15,375 176.15,377.55 184.87,386.26 184.87,413.76 188.51,417.41 188.51,453.51 222.85,487.85 244.65,487.85 R21.1 T9.1
NetQ3_1: Q3.1 R28.2 | length 75.7
  Bottom w15: Q3.1@533.23,312.89 533.23,304.39 R28.2@580.73,256.89
NetR24_2: R24.2 R26.1 | length 60.7
  Bottom w10: R24.2 R26.1
NetR25_1: R25.1 R29.1 U3.3 | length 123
  Bottom w10: U3.3 R25.1@541.94,999.49 ; R29.1 542.71,1052.71 R25.1@542.71,1003.13
NetR26_2: R26.2 R27.1 R32.1 | length 321
  Top w10: R32.1 v1(685,1310)
  Bottom w10: R26.2 R27.1 552.96,1442.04 v1(685,1310)
NetR34_1: R34.1 R38.2 U1.1 | length 135.8
  Top w8: R38.2 744.89,1417.64 R34.1 U1.1
P+: B1.2 ES9.2 ES11.1 J1.1 T14.1
P-: B2.2 ES10.1 ES11.2 J1.2 T15.1
PlateCurrent_AD: C21.2 IC1.14 R34.2 T2.1 | length 722.4
  Top w8: C21.2 560,870 v1(578.48,888.48) 660.37,970.37 660.37,1330.37 675,1345 706.32,1345 R34.2
  Bottom w8: IC1.14 529.06,891.47 549.89,912.31 556.85,912.31 556.85,911.67 578.48,890.04 v1(578.48,888.48)
PlateVoltage_AD: C18.1 IC1.15 R32.2 | length 537.1
  Top w8: C18.1 555,820 v1(590,855) 685,950 R32.2
  Bottom w8: IC1.15 553.15,854.53 589.53,854.53 v1(590,855)
PlugInCheck: IC1.27 R17.1 T8.1 | length 255
  Bottom w8: R17.1 355.73,560.32 430.63,635.21 T8.1 431.39,636.55 431.39,711.56 IC1.27
PWM: IC1.8 R16.1 T1.1 | length 910.3
  Top w8: v2(405,945) 406.91,946.91 406.91,955 464.84,1012.93 504.13,1012.93 564.37,1073.17 564.37,1325.63 502.03,1387.97 v1(502.03,1610)
  Bottom w8: T1.1 v2(405,945) 405,907.43 410.94,901.49 IC1.8
  Bottom w10: v1(502.03,1610) 502.03,1633.57 R16.1@507.03,1638.57
RESET: C16.2 IC1.5 J3.5 | length 516.7
  Top w8: v3(341.67,819.22) 342.14,818.75 404.83,818.75 C16.2@408.99,814.59 ; C16.2 406.42,816.18 408.99,813.61 408.99,802.78 417.5,794.27 613.05,794.27 J3.5
  Bottom w10: v3(341.67,819.22) 342.9,818 367.59,818 370.13,815.46 386.54,815.46 IC1.5
SW_AD: C3.2 IC1.7 R2.2 | length 545.2
  Top w10: R2.2 324.77,1310.53 324.77,1295.23 355,1265 v3(355,870) 355.28,869.72 402.31,869.72 C3.2
  Bottom w8: v3(355,870) 369.79,855.21 386.17,855.21 IC1.7
SWCLK: IC1.21 J3.2 R1.2 | length 205.3
  Bottom w8: IC1.21 579.06,735.94 597.06,717.94 614.1,717.94 R1.2 ; R1.2@615,716.53 698.47,716.53 J3.2
SWDIO: IC1.20 J3.4 R13.1 | length 216.2
  Bottom w8: IC1.20 582.5,755.63 599.83,772.96 R13.1 670.48,772.96 J3.4
VCC3V3_SYS: C2.2 C5.2 C6.2 C19.2 IC1.3 IC2.5 J3.1 R11.1 R13.2 U1.5 | length 1792.4
  Top w8: R11.1 382.38,329.37 386.75,325 v1(390,325)
  Top w10: v1(335.49,772.3) 375.03,732.76 394.84,732.76 C6.2 C5.2
  Top w15: v1(625,1450) C19.2 ; C19.2@652.76,1445 652.88,1450 652.91,1451.28 U1.5
  Power w15: v1(390,325) 590,325 735,470 J3.1@735,596.26 ; v1(625,1450) 625.5,1449.5 625.5,835 645,835
  Bottom w8: R13.2 v1(615,835)
  Bottom w10: v1(335.49,772.3) 335.79,772 367.65,772 370.18,774.54 386.54,774.54 IC1.3
  Bottom w20: IC2.5 C2.2 ; v1(265.48,741.16) 265.48,762.11 C2.2 ; v1(335.49,772.3) 330.79,767.6 C2.2
VCC5V0_SYS: B7.2 C1.2 C8.1 C11.1 C15.1 ESD2.1 ESD2.2 IC2.1 IC2.3 L3.1 R3.1 R4.1 R5.1 R6.1 R7.1 R8.1 R9.1 R14.1 R15.1 T7.1 U3.4 U3.5 | length 2542.5
  Top w10: R3.1 58.6,1836.7 58.6,1811.4 v1(60,1810) ; v1(175.1,1810.1) 175.1,1836.7 R4.1 ; R14.1 v1(270,570) ; v1(365,1815) 365.37,1815.37 365.37,1836.96 R5.1 ; v1(555,1815) R6.1@555,1836.6 ; v1(595,420) 596.39,418.61 596.39,386.39 R15.1 597.95,384.82 597.95,331.07 C15.1 ; R7.1@693.37,1834.37 694.15,1833.59 694.15,1813.91 v1(695.32,1812.73)
  Top w15: R8.1@195.47,279.37 195.47,255.47 v1(195,255) 195,230.3 R9.1
  Power w20: v1(60,1810) 117.5,1752.5 ; v1(175.1,1810.1) 135.3,1770.3 ; 181.62,1019.19 60,1140.81 60,1695 117.5,1752.5 ; v1(365,1815) 320.3,1770.3 ; v1(555,1815) 510.3,1770.3 ; v1(695.32,1812.73) 652.89,1770.3 510.3,1770.3 ; 117.5,1752.5 135.3,1770.3 ; 135.3,1770.3 320.3,1770.3 ; 320.3,1770.3 510.3,1770.3
  Bottom w8: IC2.1 137.6,767.6 150,780 150,830 137.6,842.4 IC2.3
  Bottom w10: L3.1@145.71,1016.61 L3.1@180.73,1016.61 ; L3.1@180.73,1005.82 v1@237.97,1005.82 ; 223.73,982.18 238.91,997.35 v1(239.63,997.35) ; 247.26,1005.82 247.32,1005.76
  Bottom w15: 247.32,1005.76 248.84,1004.24
  Bottom w20: v1(240,975) 240,996.99 v1(239.63,997.35) 239.63,998.2 247.26,1005.82 ; C8.1@292.7,999.49 C8.1 ; U3.4 339.49,999.49 325,985 293.25,985 C8.1 ; U3.5 336.89,1036.89 292.52,992.52 C8.1
  Bottom w30: L3.1@112.97,987.32 L3.1@142.27,1016.61 ; L3.1 L3.1@142.27,1016.61 ; L3.1@145.71,1016.61 L3.1@142.27,1016.61
  other v1: 500,525 485,560 410,570 505,580 121.18,704.24 100,730 40,740 65,740 238.03,1019.84
VCC15V0_DRV: B3.1 C9.1 C12.1 C13.1 R29.2 SD1.2 T5.1 | length 340.3
  Bottom w10: C9.1 545.63,1379.37 565,1360 565,1150 542.45,1127.45 R29.2
pads on no net: IC1.16 IC1.17 IC1.18 IC1.19 IC1.23 IC1.24 IC1.25 IC2.4 MARK1.0 MARK2.0 SW2.3 SW2.4 U3.6

## Polygon pours and split planes (outlines as drawn)
GND on Bottom "B_GND" (solid, remove dead copper, pour order 1049): -135,2280 -135,-30 915,-30 915,2280
NetQ1_1 on Bottom "NETQ1_1_L04_P1033" (solid, remove dead copper, pour order 1033): 390,1650 420,1650 470,1700 495,1700 495,1625 390,1625
P+ on Bottom "P+_L04_P1039" (solid, remove dead copper, pour order 1039): 363.14,2071.57 363.14,1940.68 346.26,1923.8 144.88,1923.8 144.88,1944.88 155,1955 305,1955 330,1980 330,2071.57
P- on Bottom "Bottom-P-" (solid, remove dead copper, pour order 1041): 280.01,1853.31 390.45,1853.31 390.45,1885.45 412.06,1907.06 412.06,2071.38 379.83,2071.38 379.83,1969.83 376.92,1966.92 376.92,1921.92 330,1875 280,1875 280.01,1874.99
NetC4_2 on Bottom "Bottom-NetC4_2" (solid, remove dead copper, pour order 1042): 135,1695 160,1670 160,1445 253.14,1445 281.13,1472.99 336.22,1472.99 336.22,1561.22 350,1575 350,1625 325,1650 325,1725 305,1745 135,1745
NetL3_2 on Bottom "NETL3_2_L04_P1043" (solid, remove dead copper, pour order 1043): 4.71,1127.83 383.84,1127.83 449.2,1062.48 488.57,1062.48 488.57,1096.43 367.48,1217.52 5.81,1217.52 4.71,1216.42
NetB3_2 on Bottom "NETB3_2_L04_P1036" (solid, remove dead copper, pour order 1036): 115,1745 115,1695 100,1680 100,1425 130,1395 130,1345 70,1345 70,1359.45 54.49,1374.96 6.7,1374.96 6.7,1716.7 35,1745
VCC15V0_DRV on Bottom "VCC15V0_DRV_L04_P1044" (solid, remove dead copper, pour order 1044): 160,1395 190,1425 302.36,1425 308.19,1430.83 331.81,1430.83 331.81,1415 541.58,1415 541.58,1351.61 403.43,1351.61 359.04,1307.23 359.04,1296.26 272.43,1296.26 223.69,1345 160,1345
VCC5V0_SYS on Bottom "VCC5V0_SYS_L04_P1045" (solid, remove dead copper, pour order 1045): 128.35,779.41 29.17,779.41 29.17,716.33 59.5,686 210,686 210,722 162.13,722 128.35,755.79
NetB7_1 on Bottom "NETB7_1_L04_P1047" (solid, remove dead copper, pour order 1047): 420.73,501.89 420.73,395.68 451.04,365.37 539.63,365.37 571.58,333.42 638.39,333.42 638.39,393.7 578.92,393.7 470.73,501.89
VCC3V3_SYS on Bottom "VCC3V3_SYS_L04_P1012" (solid, remove dead copper, pour order 1012): 249.17,779.41 249.17,735.83 255,730 270,730 295,755 295,779.41 270.83,779.41
VCC5V0_SYS on Bottom "VCC5V0_SYS_L04_P1032" (solid, remove dead copper, pour order 1032): 416.89,591.89 395,570 395,557.62 434.2,518.42 573.39,518.42 573.39,571.57 553.07,591.89 470.73,591.89
GND on Top "T_GND" (solid, remove dead copper, pour order 1035): -257.03,2304.37 -257.03,29.37 -97.03,-130.63 832.97,-130.63 932.97,-30.63 927.97,-25.63 927.97,2339.37 912.97,2354.37 -197.03,2354.37 -207.03,2354.37 -257.03,2304.37
NetB3_2 on Top "NETB3_2_L01_P1014" (solid, remove dead copper, pour order 1014): 15,1730 15,1665 55,1625 55,1535 115,1535 115,1670 55,1730
NetC4_2 on Top "NETC4_2_L01_P1034" (solid, remove dead copper, pour order 1034): 130,1535 130,1650 165,1685 265,1685 280,1670 280,1610 205,1535 160,1535
GND on Power "IN2_GND" (solid, remove dead copper, pour order 1050): 592.97,2104.37 ccw(c617.12,2128.51) 617.12,2094.37 687.97,2094.37 711.55,2094.37 cw(c711.55,1994.37) 782.26,2065.08 787.97,2059.37 787.97,575.79 cw(c687.97,575.79) 758.68,505.08 742.97,489.37 712.26,458.66 ccw(c782.97,387.95) 682.97,387.95 682.97,264.37 682.97,175.79 cw(c582.97,175.79) 653.68,105.08 642.97,94.37 cw(c630.9,106.44) 630.9,89.37 542.97,89.37 184.4,89.37 cw(c184.4,189.37) 113.68,118.66 102.97,129.37 cw(c151.26,177.65) 82.97,177.65 82.97,249.37 82.97,448.16 ccw(c31.76,448.16) 67.97,484.37 32.26,520.08 cw(c102.97,590.79) 2.97,590.79 2.97,594.37 2.97,2043.16 cw(c54.19,2043.16) 17.97,2079.37 cw(c54.19,2043.16) 54.19,2094.37 87.97,2094.37 131.76,2094.37 ccw(c131.76,2145.58) 167.97,2109.37 cw(c192.12,2085.23) 192.12,2119.37 222.97,2119.37 556.76,2119.37 cw(c556.76,2068.16) 592.97,2104.37
VCC5V0_SYS on Power "VCC5V0_SYS_L02_P1024" (solid, remove dead copper, pour order 1024): 14.68,729.68 82.51,797.51 82.51,937.51 180,1035 240,1035 260,1015 260,975 245,960 215.52,960 200,944.48 200,770 332.08,637.92 467.08,637.92 610,495 610,415 595,400 395,400 237.06,242.06 187.94,242.06 165,265 165,540 14.68,690.32
VCC3V3_SYS on Power "VCC3V3_SYS_L02_P1046" (solid, remove dead copper, pour order 1046): 250,780 260,790 545,790 605,850 700,850 700,665 725,640 750,640 770,620 770,580 755,565 700,565 685,580 685,610 600,695 290,695 250,735
GND on GND "IN3_GND" (solid, remove dead copper, pour order 1026): 672.97,2094.37 734.69,2094.37 cw(c734.69,2026.09) 782.97,2074.37 cw(c770.9,2062.3) 787.97,2062.3 787.97,2019.37 787.97,575.79 cw(c687.97,575.79) 758.68,505.08 737.97,484.37 712.26,458.66 ccw(c782.97,387.95) 682.97,387.95 682.97,289.37 682.97,175.79 cw(c582.97,175.79) 653.68,105.08 637.97,89.37 552.97,89.37 184.4,89.37 cw(c184.4,189.37) 113.68,118.66 112.97,119.37 112.26,120.08 cw(c182.97,190.79) 82.97,190.79 82.97,329.37 82.97,427.95 ccw(c-17.03,427.95) 53.68,498.66 32.97,519.37 32.26,520.08 cw(c102.97,590.79) 2.97,590.79 2.97,654.37 2.97,2043.16 cw(c54.19,2043.16) 17.97,2079.37 cw(c54.19,2043.16) 54.19,2094.37 107.97,2094.37 122.62,2094.37 ccw(c122.62,2179.73) 182.97,2119.37 cw(c195.05,2107.3) 195.05,2124.37 267.97,2124.37 571.76,2124.37 cw(c571.76,2073.16) 607.97,2109.37 ccw(c644.19,2145.58) 644.19,2094.37 672.97,2094.37

## Keep-outs
Keep-Out Layer:
  the board outline again, w0.5

## Other copper
Top:
  rectangle net GND_S: 677.97,234.37 707.97,254.37
  pour cut-out: 605.06,1737.74 605.06,1660.83 668.19,1660.83 668.19,1738.02 605.11,1738.02
Power:
  pour cut-out: 125,1045 125,1000 135,1000 155,1020
Bottom:
  rectangle net GND: 600,1610 670,1649.66
  rectangle net GND_S: 692.97,329.37 727.97,434.37
  rectangle net GND_S: 580.73,55.41 645.73,96.89
  rectangle net GND_S: 130.73,56.24 200.73,101.89
  pour cut-out: 655.32,1735.16 655.32,1656.66 cw(c643.32,1656.66) 643.32,1644.66 600.34,1644.66 cw(c600.34,1655) 590,1655 590,1723.16 cw(c602,1723.16) 602,1735.16
  region net GND_S: 727.97,319.37 707.97,299.37 707.97,324.37 712.97,329.37 727.97,329.37
  region net VCC5V0_SYS: 2.41,1060.95 221.24,1060.95 221.24,1050.45 251.41,1020.28 314.47,1020.28 314.47,966.93 312.31,964.76 2.41,964.76
  pour cut-out: 221.24,1060.95 221.24,1127.83 4.71,1127.83 2.41,1125.54 2.41,1060.95
  pour cut-out: 160,1670 100,1670 100,1445 160,1445

## Silkscreen, mask and mechanical layers (free items; w line width, h text height)
Silkscreen Bottom:
  lines w5: 420.73,121.89 420.73,131.89 ; 430.73,131.89 420.73,131.89 ; 520.73,116.89 435.73,116.89 420.73,131.89
  text "DRY+" at 365.73,2196.89 h35 r90
  text "DRY-" at 410.73,2196.89 h35 r90
  text "Earth" at 455.73,2196.89 h35 r90
  text "Earth" at 267.97,124.37 h25 r90
  text "EN" at 302.97,119.37 h25 r90
  text "GND" at 475.73,111.89 h25 r90
  text "VCC" at 525.73,111.89 h25 r90
  text "NC" at 437.97,109.37 h25 r90
  text "STA" at 382.97,104.37 h25 r90
Assembly Drawing Top:
  the board outline again, w0.5
Layer_14:
  drawing of 219 lines, arcs and shapes, not listed